# Altium PCB LoRaSocket.PcbDoc
Units mil, origin at the board's own origin, x right, y up, seen from the top; angles counter-clockwise.
Board outline 1300 x 900 mil, 2 copper layers (Top Layer, Bottom Layer); 3 components, 16 nets, 32 pads, 0 vias.
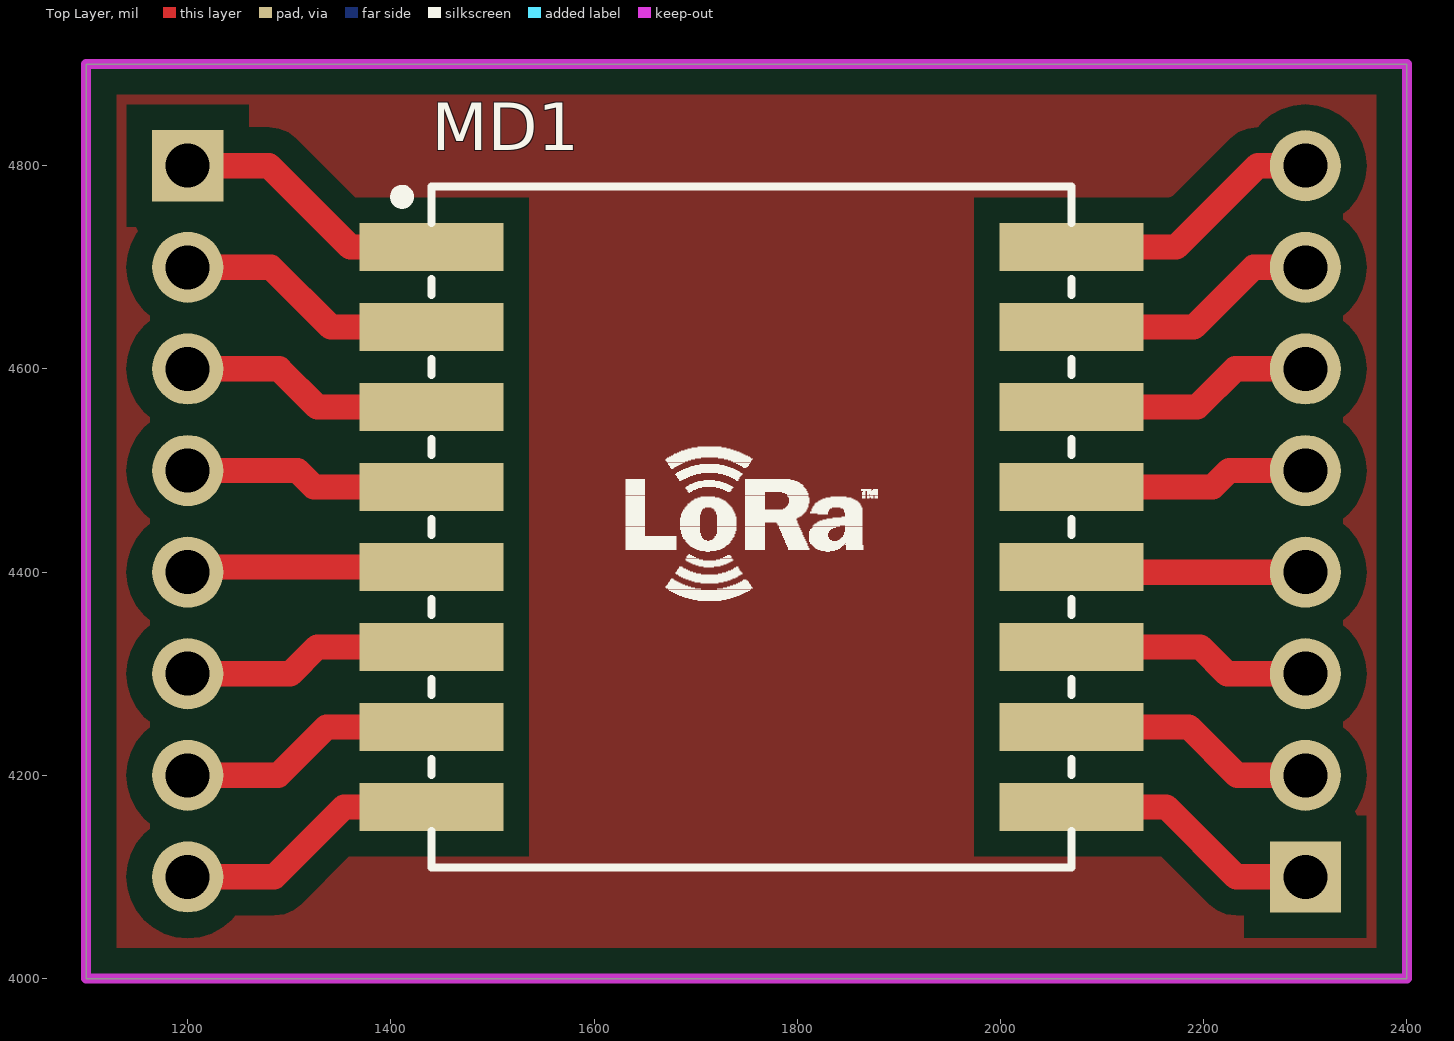
[diagram p0: Top Layer view]
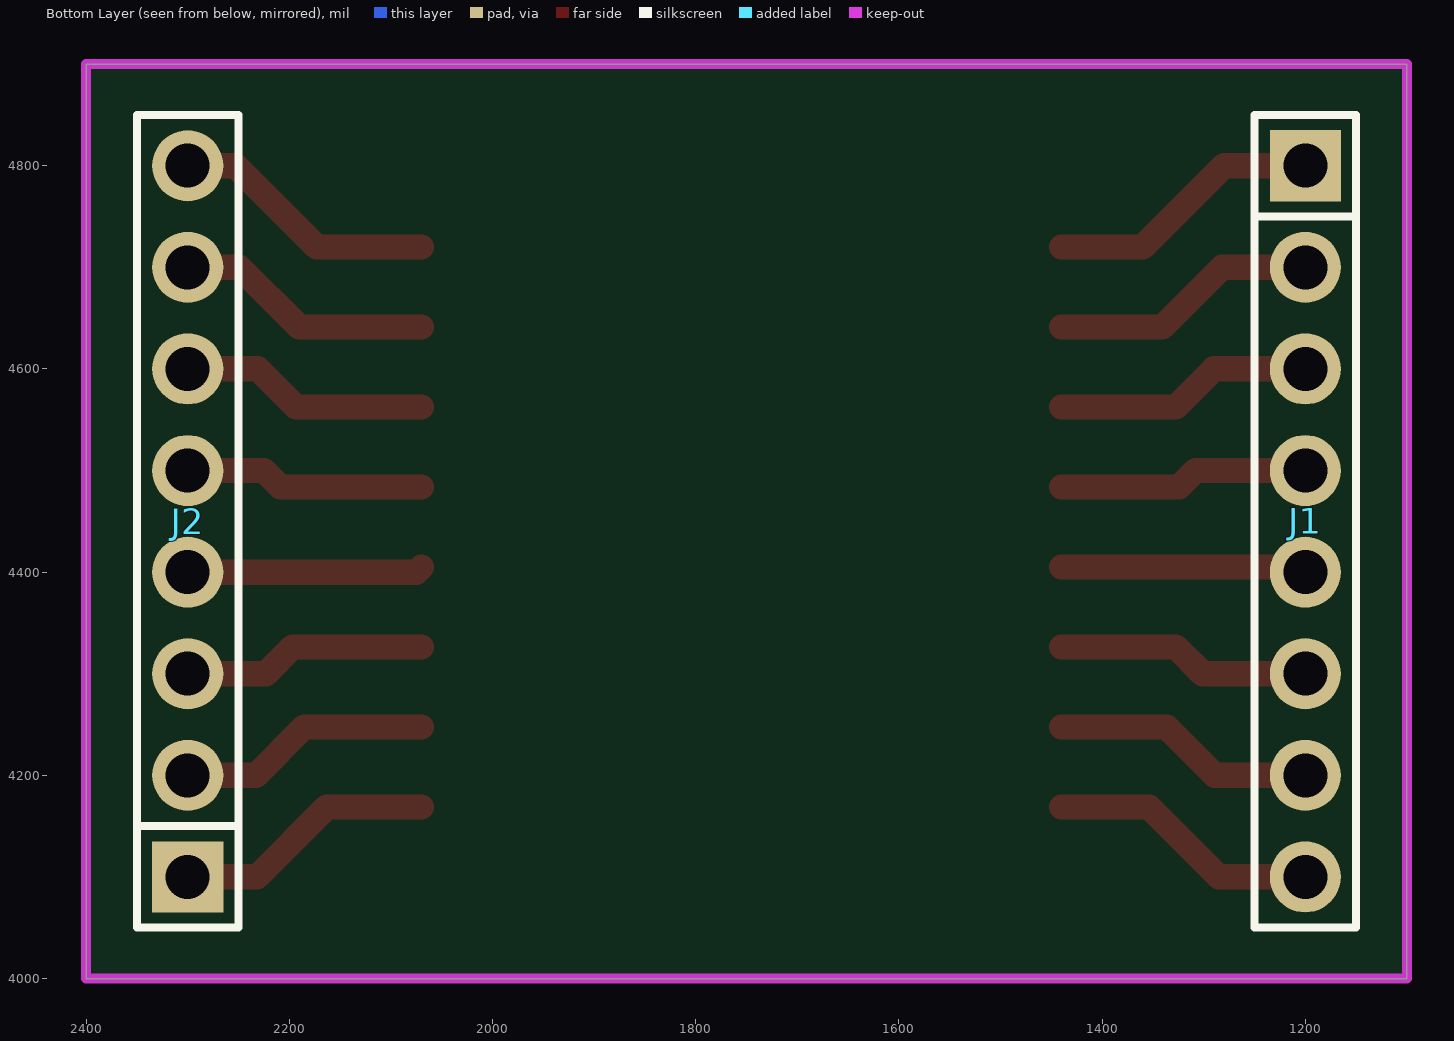
[diagram p1: Bottom Layer view, seen from below]

## Layer stack, top to bottom
Top Solder: solder mask 0.4, Solder Resist, Dk 3.5
Top Layer: signal copper 1.4
Dielectric 1: dielectric 12.6, FR-4, Dk 4.8
Bottom Layer: signal copper 1.4
Bottom Solder: solder mask 0.4, Solder Resist, Dk 3.5

## Board outline
1100,4000 1100,4900 2400,4900 2400,4000

## Design rules (kind name [scope] priority, off if disabled: settings)
Clearance Clearance_1 [InNamedPolygon('Top-NONET')] p1: gap=25
Clearance [All] p2: gap=10
PolygonConnect PolygonConnect_1 [All vs IsNamedPolygon('Top-NONET')] p1: connectstyle=Relief reliefconductorwidth=25 reliefentries=4 polygonreliefangle="90 Angle" airgapwidth=10
PolygonConnect [All] p2: connectstyle=Relief reliefconductorwidth=10 reliefentries=4 polygonreliefangle="90 Angle" airgapwidth=10
RoutingVias [All] p1: holewidth=28 width=50 viastyle="Through Hole" minholewidth=28 minwidth=50 maxholewidth=28 maxwidth=50
SolderMaskExpansion [All] p1: expansion=4
Width [All] p1: maxlimit=50 minlimit=10 preferedwidth=25
30 further rules are at their usual default settings.

## Components (designator, comment, footprint, x,y, rotation, side; value= is the part's Value field where it differs from the comment)
J1 "JP8" JP8-D1T 1200,4800 r270 bottom
J2 "JP8" JP8-D1T 2300,4100 r90 bottom
MD1 "LORA-RA01" LORA-RA01 1754.96,4444.41 r0 top

## Footprints (in the part's own frame and the unit in brackets; to place one, negate y for a bottom-side part, rotate by r counter-clockwise, add the part's x,y. Pads: shape width x height; smd on the part's side, far side on the other; paste and mask are expansions set on the pad)
JP8-D1T [mil] "8 pins, 1 row, straight, gold plating"
  rect 70x70 hole 43.31: 1(0,0)
  round 70 hole 43.31: 2(100,0) 3(200,0) 4(300,0) 5(400,0) 6(500,0) 7(600,0) 8(700,0)
  silkscreen extent -50,-50 750,50, body extent -50,-50 750,50, height 336
LORA-RA01 [mil]
  rect 141.73x47.24 smd: 1(-314.96,275.59) 2(-314.96,196.85) 3(-314.96,118.11) 4(-314.96,39.37) 5(-314.96,-39.37) 6(-314.96,-118.11) 7(-314.96,-196.85) 8(-314.96,-275.59) 9(314.96,-275.59) 10(314.96,-196.85) 11(314.96,-118.11) 12(314.96,-39.37) 13(314.96,39.37) 14(314.96,118.11) 15(314.96,196.85) 16(314.96,275.59)
  silkscreen extent -350,-335 315,335, body extent -315,-335 315,335, height 126

## Part data
J1 J2: "WR-PHD 2.54 mm Angled Socket Header"
MD1: "Module LoRa RA-01 SX1278"

## Nets (pads, with @x,y where several pads share a name; then routed paths per layer and width w, separated by ;. In a path a pad name is that pad's centre, name@x,y a point inside that pad or via, vN(x,y) a via of type N, cw(c..) or ccw(c..) an arc to the next point about the centre after c; other vN are vias at no path point)
NetJ1_1: J1.1 MD1.1 | length 273.1
  Top Layer w25: J1.1 1280,4800 1360,4720 MD1.1
NetJ1_2: J1.2 MD1.2 | length 264.3
  Top Layer w25: J1.2 1282,4700 1340.74,4641.26 MD1.2
NetJ1_3: J1.3 MD1.3 | length 255.5
  Top Layer w25: J1.3 1290,4600 1327.48,4562.52 MD1.3
NetJ1_4: J1.4 MD1.4 | length 246.7
  Top Layer w25: J1.4 1308,4500 1324.22,4483.78 MD1.4
NetJ1_5: J1.5 MD1.5 | length 242.1
  Top Layer w25: J1.5 1205.04,4405.04 MD1.5
NetJ1_6: J1.6 MD1.6 | length 250.9
  Top Layer w25: J1.6 1301,4300 1327.3,4326.3 MD1.6
NetJ1_7: J1.7 MD1.7 | length 259.7
  Top Layer w25: J1.7 1289,4200 1336.56,4247.56 MD1.7
NetJ1_8: J1.8 MD1.8 | length 268.5
  Top Layer w25: J1.8 1285,4100 1353.82,4168.82 MD1.8
NetJ2_1: J2.1 MD1.9 | length 258.6
  Top Layer w25: MD1.9 2163.18,4168.82 2232,4100 J2.1
NetJ2_2: J2.2 MD1.10 | length 249.8
  Top Layer w25: MD1.10 2185.44,4247.56 2233,4200 J2.2
NetJ2_3: J2.3 MD1.11 | length 241
  Top Layer w25: MD1.11 2196.7,4326.3 2223,4300 J2.3
NetJ2_4: J2.4 MD1.12 | length 232.2
  Top Layer w25: MD1.12 2074.96,4400 J2.4
NetJ2_5: J2.5 MD1.13 | length 236.8
  Top Layer w25: MD1.13 2208.78,4483.78 2225,4500 J2.5
NetJ2_6: J2.6 MD1.14 | length 245.6
  Top Layer w25: MD1.14 2193.52,4562.52 2231,4600 J2.6
NetJ2_7: J2.7 MD1.15 | length 254.4
  Top Layer w25: MD1.15 2190.26,4641.26 2249,4700 J2.7
NetJ2_8: J2.8 MD1.16 | length 263.2
  Top Layer w25: MD1.16 2173,4720 2253,4800 J2.8

## Polygon pours and split planes (outlines as drawn)
no net on Top Layer "Top-NONET" (solid, pour order 0): 1100,4000 1100,4900 2400,4900 2400,4000

## Keep-outs
Keep-Out Layer:
  the board outline again, w10